# Altium PCB ADCS.PcbDoc
Units mm, origin at the board's own origin, x right, y up, seen from the top; angles counter-clockwise.
Board outline 37.67 x 75.03 mm, 4 copper layers (Top Layer, Ground Plane, Power Plane, Bottom Layer), stack 0.844 mm thick; 27 components, 59 nets, 210 pads, 48 vias.
Unrouted connection lines stored in the file: 13.
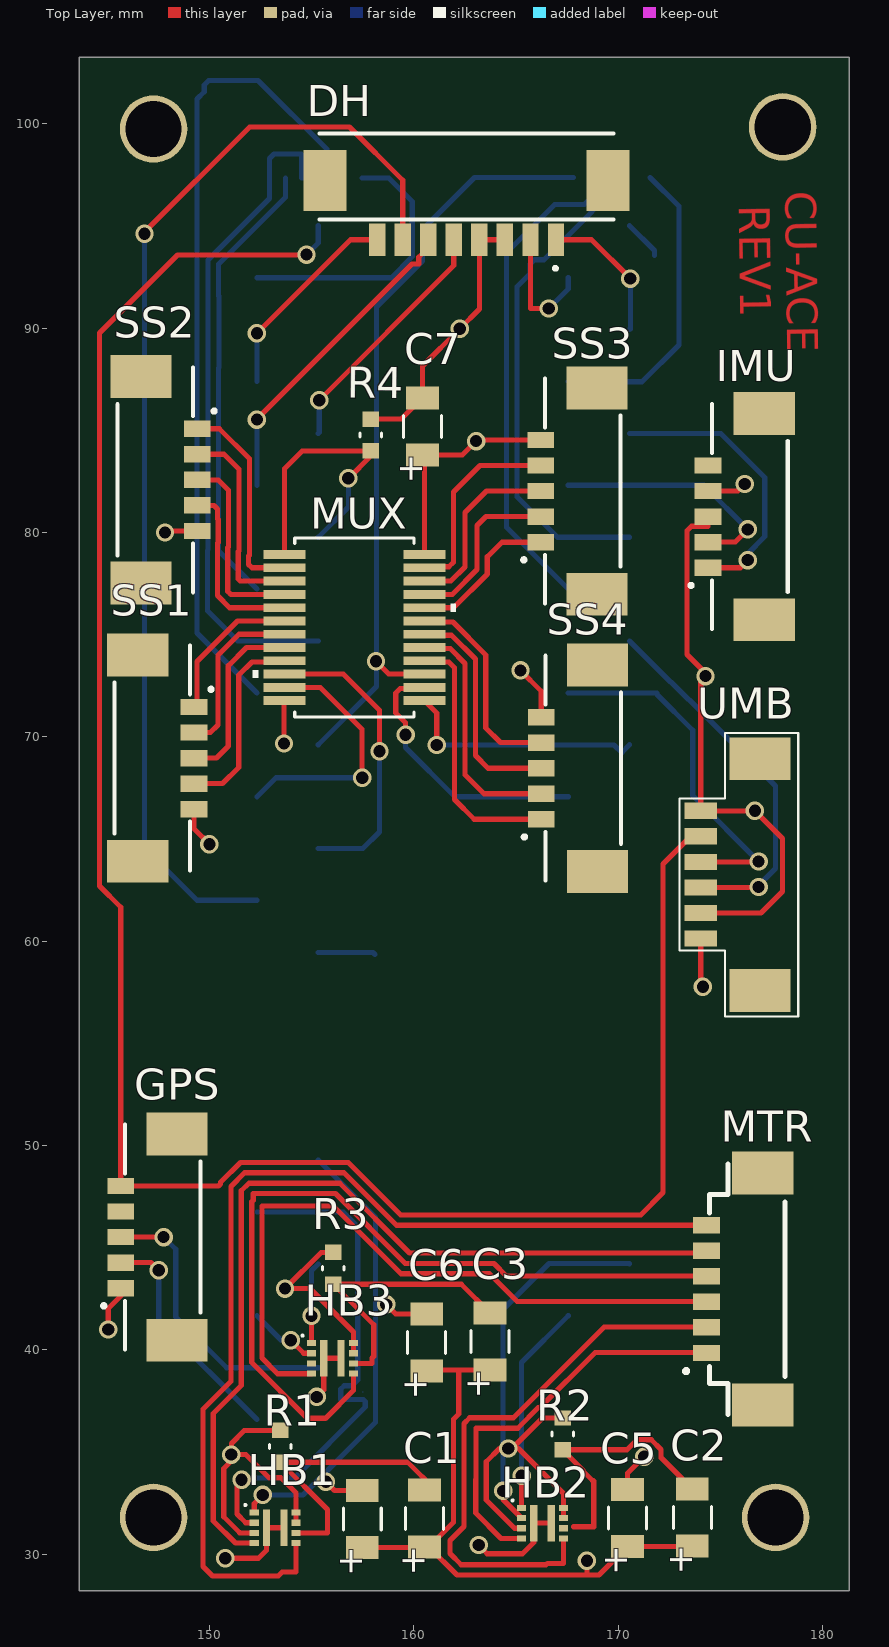
[diagram p0: Top Layer view]
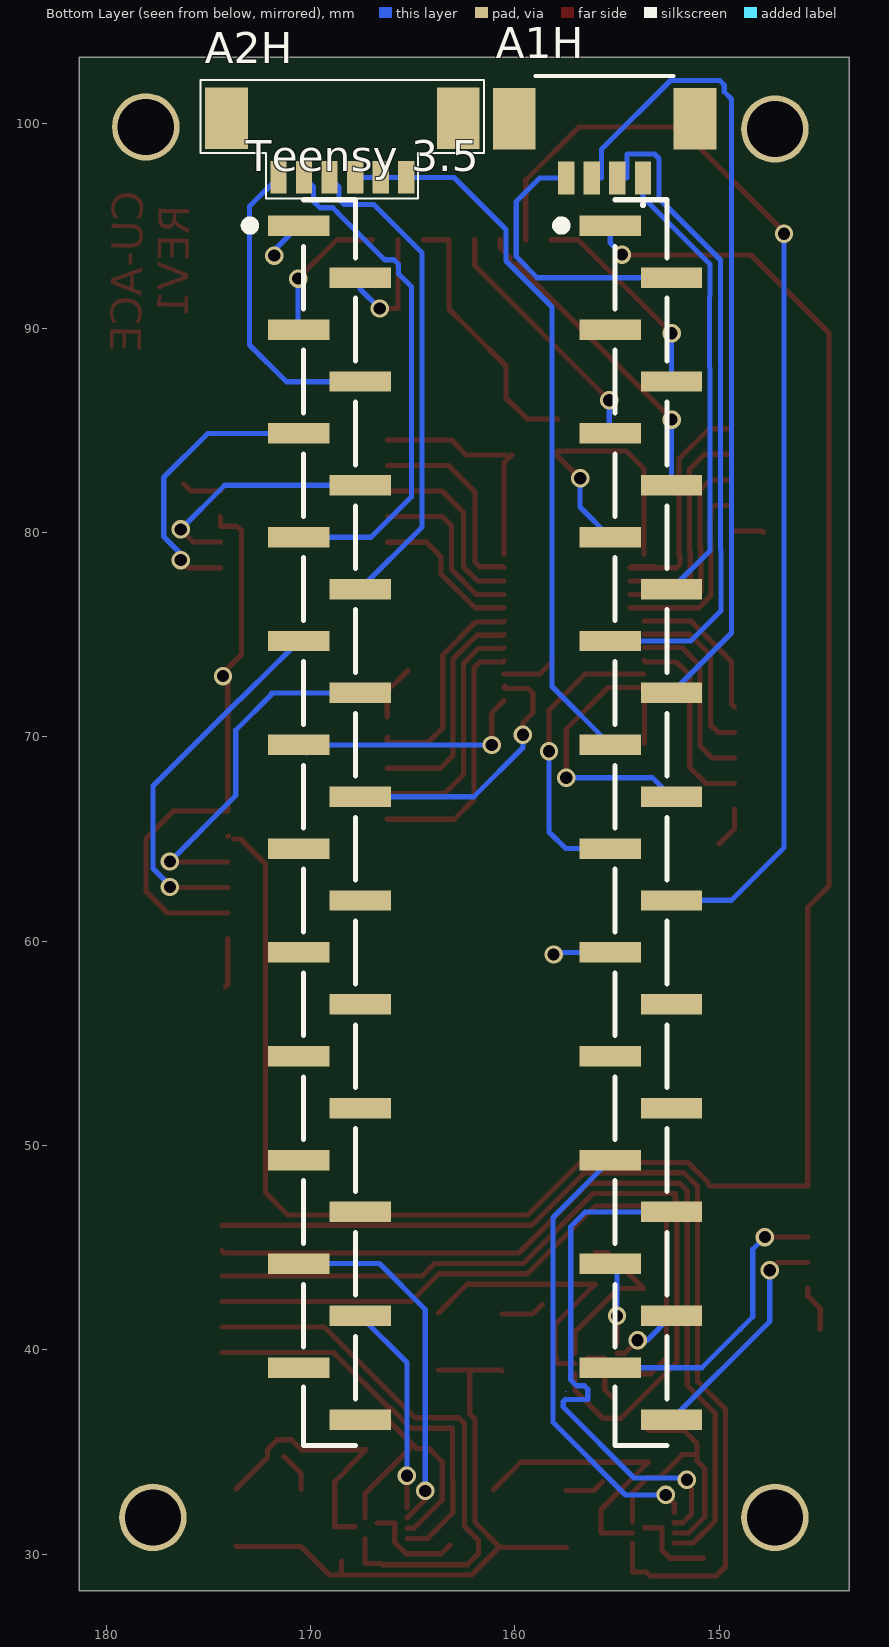
[diagram p1: Bottom Layer view, seen from below]
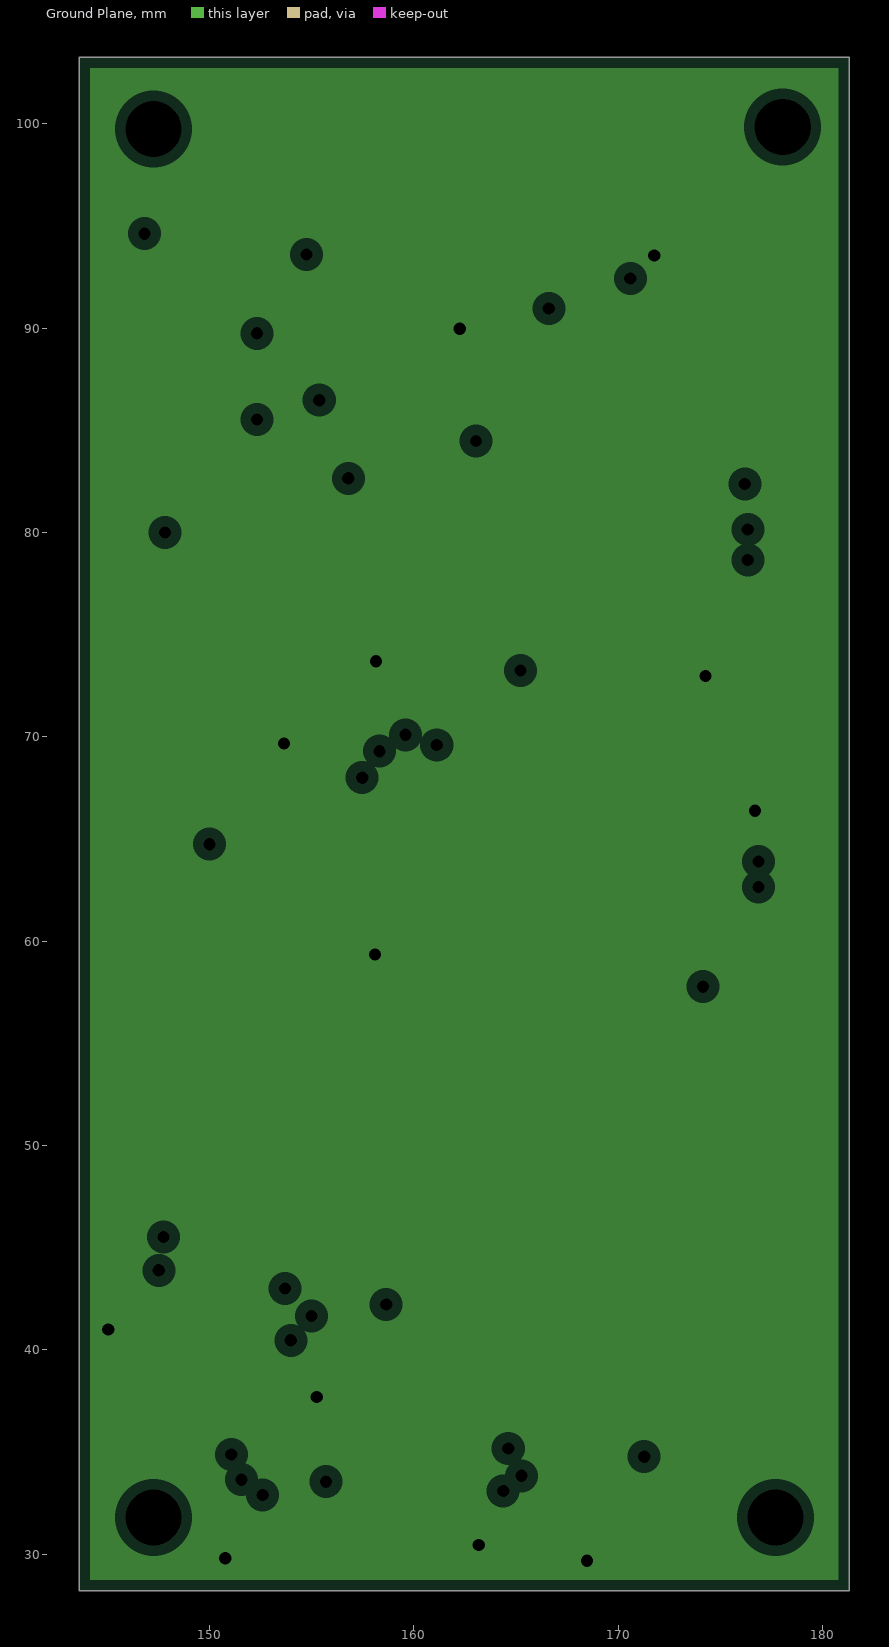
[diagram p2: Ground Plane, clearances drawn from the general rule]
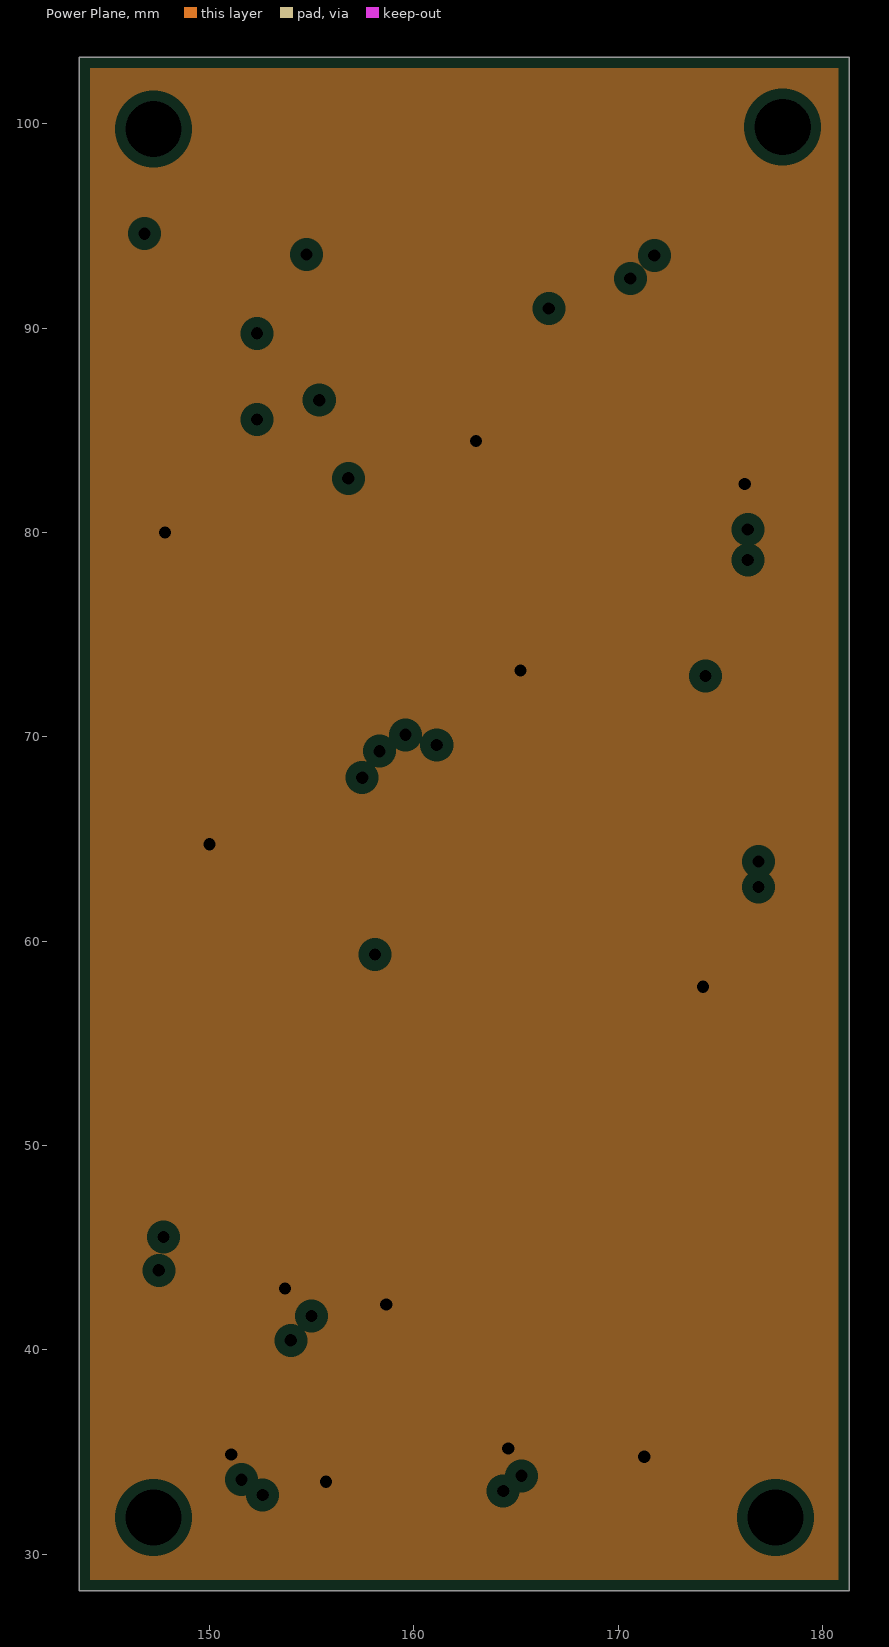
[diagram p3: Power Plane, clearances drawn from the general rule]

## Layer stack, top to bottom
Top Solder: solder mask 0.0102, Solder Resist, Dk 3.5
Top Layer: signal copper 0.0356
Dielectric 1: core 0.32, FR-4, Dk 4.8
Ground Plane: plane copper 0.036, net GND
Dielectric 3: prepreg 0.127, Dk 4.2
Power Plane: plane copper 0.036, net 3.3V
Dielectric 4: core 0.254, Dk 4.2
Bottom Layer: signal copper 0.0356
Bottom Solder: solder mask 0.0102, Solder Resist, Dk 3.5

## Board outline
143.637,103.251 181.305,103.251 181.305,28.219 143.637,28.219

## Design rules (kind name [scope] priority, off if disabled: settings)
Clearance Clearance_1 [All] p1: gap=0.254 ignorepadtopadclearanceinfootprint=FALSE except(0: Arc-Hole Track-Hole SMDPad-Hole THPad-Hole Via-Hole Fill-Hole Poly-Hole Region-Hole Text-Hole)
PlaneClearance [All] p1: clearance=0.508
PlaneConnect [InNet('3.3V')] p1: planeconnectstyle=Relief reliefexpansion=0.508 reliefentries=4 reliefconductorwidth=0.254 reliefairgap=0.254
PolygonConnect [All] p1: connectstyle=Relief reliefconductorwidth=0.254 reliefentries=4 polygonreliefangle="90 Angle" airgapwidth=0.254
RoomDefinition Top [InComponentClass('Top')] p1: confinementstyle=ConfineIn formatcopy=TRUE lockcomponents=FALSE outline 0,0 50.8,0 50.8,25.4 0,25.4
RoutingVias [All] p1: holewidth=0.6 width=0.9 viastyle="Through Hole" minholewidth=0.6 minwidth=0.9 maxholewidth=0.6 maxwidth=0.9
SMDNeckDown [All] p1: percent=50.000
SolderMaskExpansion [All] p1: expansion=0.102
Width [All] p1: maxlimit=0.254 minlimit=0.254 preferedwidth=0.254
28 further rules are at their usual default settings.

## Components (designator, comment, footprint, x,y, rotation, side; value= is the part's Value field where it differs from the comment)
A1H "53261-0471" 53261-0471 155.6,98.146 r0 bottom
A2H "53261-0671" 53261-0671 171.563,97.379 r0 bottom
C1 "C1206" CC1206N 160.528,31.75 r90 top value="10uF (10V)"
C2 "C1206" CC1206N 173.634,31.801 r90 top value="10uF (10V)"
C3 "C1206" CC1206N 163.728,40.411 r90 top value="10uF (10V)"
C4 "C0402" CC1206N 157.48,31.725 r90 top value="1uF (10V)"
C5 "C0402" CC1206N 170.459,31.775 r90 top value="1uF (10V)"
C6 "C0402" CC1206N 160.63,40.361 r90 top value="1uF (10V)"
C7 "C0402" CC1206N 160.426,85.192 r90 top value="0.1uF (10V)"
DH "53261-0871" 53261-0871 162.585,95.326 r180 top
GPS "53398-0571" 53398-0571 145.862,45.521 r90 top
HB1 "H-Bridge" AP1017 154.245,30.543 r0 top
HB2 "H-Bridge" AP1017 167.326,30.771 r0 top
HB3 "H-Bridge" AP1017 157.048,38.837 r0 top
IMU "53398-0571" 53398-0571 174.601,80.779 r90 top
MTR "53398-0671" 533980671 174.475,42.975 r90 top
MUX "CD74HC4067SM96" CD74HC4067SM96 152.857,79.658 r0 top
R1 "ERJ-3EKF6042V" RC0603N 153.467,35.281 r270 top value=Value
R2 "ERJ-3EKF6042V" RC0603N 167.284,35.89 r270 top value=Value
R3 "ERJ-3EKF6042V" RC0603N 156.058,43.993 r270 top value=Value
R4 "" RC0603N 157.9,84.772 r270 top value=Value
SS1 "53398-0571" 53398-0571 149.047,68.961 r270 top
SS2 "53398-0571" 53398-0571 149.2,82.575 r270 top
SS3 "53398-0571" 53398-0571 166.418,82.027 r90 top
SS4 "53398-0571" 53398-0571 166.443,68.468 r90 top
"Teensy 3.5" "61002418221" 61002418221 169.065,89.93 r270 bottom
UMB "53261-0671" 53261-0671 174.041,66.379 r90 top

## Footprints (in the part's own frame and the unit in brackets; to place one, negate y for a bottom-side part, rotate by r counter-clockwise, add the part's x,y. Pads: shape width x height; smd on the part's side, far side on the other; paste and mask are expansions set on the pad)
53261-0471 [mm]
  rect 0.8x1.6 smd: 1(-1.875,0.8) 2(-0.625,0.8) 3(0.625,0.8) 4(1.875,0.8)
  rect 2.1x3 smd: 5(4.425,-2.1) 6(-4.425,-2.1)
  silkscreen extent -3.37,-4.2 3.37,2.17
53261-0671 [mm]
  rect 0.8x1.6 smd: 1(0,0) 2(-1.25,0) 3(-2.5,0) 4(-3.75,0) 5(-5,0) 6(-6.25,0)
  rect 2.1x3 smd: 7(-8.8,-2.9) 8(2.55,-2.9)
  silkscreen extent -10.06,-4.78 3.81,1.03
53261-0871 [mm]
  rect 0.8x1.6 smd: 1(-4.375,1.004) 2(-3.125,1.004) 3(-1.875,1.004) 4(-0.625,1.004) 5(0.625,1.004) 6(1.875,1.004) 7(3.125,1.004) 8(4.375,1.004)
  rect 2.1x3 smd: 9(6.925,-1.896) 10(-6.925,-1.896)
  silkscreen extent -7.19,-4.2 7.19,2.46
53398-0571 [mm]
  rect 0.8x1.3 smd: 1(-2.5,0.2) 2(-1.25,0.2) 3(0,0.2) 4(1.25,0.2) 5(2.5,0.2)
  rect 2.1x3 smd: 6(-5.05,-2.55) 7(5.05,-2.55)
  silkscreen extent -5.5,-3.7 5.5,1.11
533980671 [mm]
  rect 0.8x1.3 smd: 1(-3.125,0.15) 2(-1.875,0.15) 3(-0.625,0.15) 4(0.625,0.15) 5(1.875,0.15) 6(3.125,0.15)
  rect 2.1x3 smd: 7(-5.675,-2.6) 8(5.675,-2.6)
  silkscreen extent -6.12,-3.7 6.12,1.22
61002418221 [mm]
  rect 1x3 smd: 1(-5.08,-1.5) 2(-2.54,1.5) 3(0,-1.5) 4(2.54,1.5) 5(5.08,-1.5) 6(7.62,1.5) 7(10.16,-1.5) 8(12.7,1.5) 9(15.24,-1.5) 10(17.78,1.5) 11(20.32,-1.5) 12(22.86,1.5) 13(25.4,-1.5) 14(27.94,1.5) 15(30.48,-1.5) 16(33.02,1.5) 17(35.56,-1.5) 18(38.1,1.5) 19(40.64,-1.5) 20(43.18,1.5) 21(45.72,-1.5) 22(48.26,1.5) 23(50.8,-1.5) 24(53.34,1.5) 25(53.34,16.74) 26(50.8,13.74) 27(48.26,16.74) 28(45.72,13.74) 29(43.18,16.74) 30(40.64,13.74) 31(38.1,16.74) 32(35.56,13.74) 33(33.02,16.74) 34(30.48,13.74) 35(27.94,16.74) 36(25.4,13.74) 37(22.86,16.74) 38(20.32,13.74) 39(17.78,16.74) 40(15.24,13.74) 41(12.7,16.74) 42(10.16,13.74) 43(7.62,16.74) 44(5.08,13.74) 45(2.54,16.74) 46(0,13.74) 47(-2.54,16.74) 48(-5.08,13.74)
  silkscreen extent -6.35,-4.09 54.61,16.51
AP1017 [mm] "SON, 8-Leads, Body 2.00x2.00mm, Pitch 0.50mm, Thermal Pad 1.80x1.07mm, IPC Medium Density"
  rect 0.45x0.3 smd: 1(-2.05,1.5) 2(-2.05,1) 3(-2.05,0.5) 4(-2.05,0) 5(0,0) 6(0,0.5) 7(0,1) 8(0,1.5)
  rect 0.35x1.8 smd: 9(-1.45,0.75) 9(-0.6,0.75)
  silkscreen extent -2.54,1.81 -2.44,1.91, body extent -2.05,-0.27 0,1.78, height 0.6
CC1206N [mil]
  rect 44x63 smd paste+0 mask+0: 1(-55,0) 2(55,0)
  silkscreen extent -21,-36 21,36, body extent 0,0 10,10, height 10
CD74HC4067SM96 [mil] "16:1 Mux"
  rect 81x17 smd: 1(32,-29) 2(32,-54.59) 3(32,-80.18) 4(32,-105.77) 5(32,-131.36) 6(32,-156.95) 7(32,-182.54) 8(32,-208.13) 9(32,-233.72) 10(32,-259.31) 11(32,-284.91) 12(32,-310.5) 13(302,-310.5) 14(302,-284.91) 15(302,-259.31) 16(302,-233.72) 17(302,-208.13) 18(302,-182.54) 19(302,-156.95) 20(302,-131.36) 21(302,-105.77) 22(302,-80.18) 23(302,-54.59) 24(302,-29)
  silkscreen extent -28,-342 362,3, body extent 167,-170 177,-160, height 10
RC0603N [mm]
  rect 0.756x0.8 smd paste+0 mask+0: 1(-0.778,0) 2(0.778,0)
  silkscreen extent -0.09,-0.53 0.09,0.53, body extent 0,0 0.25,0.25, height 0.25

## Part data
A1H: "4 way SMT r/a header Molex PICOBLADE Series, Series Number 53261, 1.25mm Pitch 4 Way 1 Row Shrouded Right Angle PCB Header, Surface Mount", Manufacturer_Name=Molex, RS Part Number=5427113P, Datasheet Link=http://www.molex.com/webdocs/datasheets/pdf/en-us//0532610471_PCB_HEADERS.pdf, Geometry.Height=mm, Manufacturer_Part_Number=53261-0471, Supplier_Name=RS
A2H UMB: "Molex PICOBLADE Series, Series Number 53261, 1.25mm Pitch 6 Way 1 Row Right Angle PCB Header, Solder Termination, 1A", Manufacturer_Name=Molex, RS Part Number=5427135P, Datasheet Link=http://docs-europe.electrocomponents.com/webdocs/078f/0900766b8078fc7f.pdf, Geometry.Height=mm, Manufacturer_Part_Number=53261-0671, Supplier_Name=RS
C1 C2 C3 C4 C5 C6 C7: "Ceramic Chip Capacitor - Standard", PackageDocument=Mar-2001, ComponentLink1Description="Manufacturer Link", ComponentLink1URL=http://www.kemet.com/, ComponentLink2Description=Datasheet, ComponentLink2URL=http://www.kemet.com/kemet/web/homepage/kechome.nsf/vapubfilesname/F3102TA.pdf/$file/F3102TA.pdf, DatasheetDocument=Mar-2001, LatestRevisionDate=19-Mar-2004, LatestRevisionNote="Silkscreen size reduced.", Published=17-Jul-2002, Publisher="Altium Limited"
  C1 C2 C3: Code_IPC="3216 [1206]", Code_JEITA=1206, PackageReference=1206
  C4 C5 C6 C7: Code_IPC="1005 [0402]", Code_JEITA=0402, Note="Footprint corresponds to dimensions for bulk cassette packaging. This case size has tightened tolerances.", PackageReference=0402
DH: "Molex PICOBLADE Series, Series Number 53261, 1.25mm Pitch, 8 Way 1 Row Shrouded Right Angle PCB Header, Surface Mount", Manufacturer_Name=Molex, RS Part Number=5427157P, Datasheet Link=http://www.molex.com/webdocs/datasheets/pdf/en-us/0532610871_PCB_HEADERS.pdf, Geometry.Height=mm, Manufacturer_Part_Number=53261-0871, Supplier_Name=RS
GPS IMU SS1 SS2 SS3 SS4: "Molex PICOBLADE Series, Series Number 53398, 1.25mm Pitch 5 Way 1 Row Straight PCB Header, Solder Termination, 1A", Manufacturer_Name=Molex, RS Part Number=5427292, Datasheet Link=http://www.molex.com/pdm_docs/sd/533980571_sd.pdf, Geometry.Height=mm, Manufacturer_Part_Number=53398-0571, Supplier_Name=RS
HB1 HB2 HB3: library part AP1017AEN
MTR: "Molex PICOBLADE Series, Series Number 53398, 1.25mm Pitch 6 Way 1 Row Straight PCB Header, Solder Termination, 1A", Manufacturer_Name=Molex, RS Part Number=5427214P, Allied_Number=70090674, Datasheet Link=http://docs-europe.electrocomponents.com/webdocs/13c4/0900766b813c4502.pdf, Geometry.Height=mm, Manufacturer_Part_Number=53398-0671, Supplier_Name=RS
R1 R2 R3: "Imported", Built_By=EMA_UL_Team, C="Copyright (C) 2015 Accelerated Designs. All rights reserved", Manufacturer_Part_Number=ERJ-3EKF6042V, Vendor=Panasonic
R4: library part ERJ-3EKF6042V, "Imported", Built_By=EMA_UL_Team, C="Copyright (C) 2015 Accelerated Designs. All rights reserved", Manufacturer_Part_Number=ERJ-3EKF6042V, Vendor=Panasonic
"Teensy 3.5": "Wurth Elektronik WR-PHD Series, Series Number 6100, 2.54mm Pitch 24 Way 1 Row Right Angle PCB Header", Manufacturer_Name="Würth Elektronik", RS Part Number=1216841, Datasheet Link=http://katalog.we-online.de/em/datasheet/6100xx18221.pdf, Geometry.Height=mm, Manufacturer_Part_Number=61002418221, Supplier_Name=RS

## Free pads (board coordinates)
  round 3.302 hole 2.75: 6(147.269,31.801) 6(147.269,99.746) 6(177.709,31.801) 6(178.054,99.847)

## Via types
v1: diameter 0.9, hole 0.6, Top Layer to Bottom Layer, 25 vias
v2: diameter 0.9, hole 0.6, Top Layer to Power Plane, 12 vias
v3: diameter 0.9, hole 0.6, Top Layer to Ground Plane, 9 vias
v4: diameter 0.9, hole 0.6, Ground Plane to Bottom Layer, 2 vias

## Nets (pads, with @x,y where several pads share a name; then routed paths per layer and width w, separated by ;. In a path a pad name is that pad's centre, name@x,y a point inside that pad or via, vN(x,y) a via of type N, cw(c..) or ccw(c..) an arc to the next point about the centre after c; other vN are vias at no path point)
3.3V: C4.2 C5.2 C6.2 C7.1 HB1.3 HB1.7 HB1.8 HB2.3 HB2.7 HB2.8 HB3.3 HB3.7 HB3.8 IMU.4 MUX.24 R1.1 R2.1 R3.1 SS1.5 SS2.5 SS3.5 SS4.5 UMB.6 | length 62.9
  Top Layer w0.254: v2(147.825,80) 147.9,80.075 SS2.5 ; SS1.5 149.247,65.503 v2(150,64.75) ; 151.49,31.043 HB1.3 ; 151.49,31.051 151.482,31.051 150.698,31.834 150.698,34.198 151.075,34.575 v2(151.075,34.875) ; R1.1 151.708,36.058 151.075,35.425 v2(151.075,34.875) ; HB1.7@154.245,31.574 HB1.8 154.245,33.007 153.507,33.744 152.909,33.744 151.778,34.875 v2(151.075,34.875) ; v2(155.7,33.55) 156.128,33.122 C4.2 ; R3.1 155.471,44.771 v2(153.7,43) 154.925,43 157.048,40.877 HB3.8 HB3.7 ; v2(158.65,42.225) 159.117,41.758 C6.2 ; C7.1@160.147,83.795 160.528,83.414 MUX.24 ; C7.1 162.37,83.795 v2(163.05,84.475) 163.102,84.527 SS3.5 ; 165.125,35.175 167.326,32.974 HB2.8 HB2.7 ; v2(165.225,73.25) 166.243,72.232 SS4.5 ; HB2.3 164.929,31.271 163.544,32.656 163.544,33.444 163.551,33.451 163.551,34.525 164.201,35.175 v2(164.625,35.175) 164.81,35.175 166.303,36.668 R2.1 ; C5.2 170.459,33.959 v2(171.275,34.775) ; UMB.6 174.041,57.884 v2(174.15,57.775) ; IMU.4 175.854,82.029 v2(176.2,82.375)
5V: "Teensy 3.5.48" GPS.5 UMB.2 | length 102.3
  Top Layer w0.254: v1(154.75,93.6) 154.725,93.575 148.432,93.575 144.616,89.759 144.616,62.703 145.662,61.657 GPS.5 150.446,48.021 150.546,48.121 150.546,48.205 151.515,49.174 156.798,49.174 159.364,46.608 171.108,46.608 172.2,47.7 172.2,63.776 173.424,65 UMB.2@173.75,65 ; UMB.2@174.02,65.15 UMB.2
  Bottom Layer w0.254: v1(154.75,93.6) 155.325,94.175 155.325,95.01
A2: "Teensy 3.5.38" A2H.4 A2H.5 A2H.6 | length 35.8
  Bottom Layer w0.254: 155.325,69.61 158.175,72.46 158.175,91.032 160.433,93.29 160.433,94.833 162.979,97.379 A2H.6 A2H.5 A2H.4
A3: "Teensy 3.5.39" A1H.3 | length 40.5
  Bottom Layer w0.254: 152.325,72.15 149.392,75.083 149.392,101.217 149.744,101.569 149.744,101.903 149.968,102.127 152.383,102.127 155.756,98.753 155.756,97.346 A1H.3
A4: "Teensy 3.5.40" A1H.2 | length 32.7
  Bottom Layer w0.254: A1H.2 154.506,97.346 154.506,98.527 153.168,98.527 152.944,98.303 152.944,96.347 149.936,93.338 149.936,79.161 149.9,79.125 149.9,76.175 151.385,74.69 155.325,74.69
A5: "Teensy 3.5.41" A1H.1 | length 22.3
  Bottom Layer w0.254: 152.325,77.23 150.444,79.111 150.444,88.048 150.475,88.079 150.475,91.558 150.444,91.589 150.444,93.128 153.725,96.409 A1H.1
A6: "Teensy 3.5.42" MUX.1 R4.2 | length 14.1
  Top Layer w0.254: MUX.1 153.67,83.12 154.544,83.994 R4.2 157.9,83.75 v1(156.8,82.65)
  Bottom Layer w0.254: 155.325,79.77 156.8,81.245 v1(156.8,82.65)
A_GND: "Teensy 3.5.47" A1H.4 | length 13.7
  Bottom Layer w0.254: 152.325,92.47 158.895,92.47 159.925,93.5 159.925,96.2 158.779,97.346 A1H.4
GND: "Teensy 3.5.1" "Teensy 3.5.34" C1.1 C2.1 C3.1 C4.1 C5.1 C6.1 C7.2 DH.3 DH.4 GPS.1 HB1.9 HB2.9 HB3.9 IMU.3 MUX.12 MUX.15 R4.1 UMB.1 UMB.5 | length 94.6
  Top Layer w0.254: v3(145.05,41) 145.05,42.025 145.662,42.637 GPS.1 ; v3(150.775,29.8) 152.4,29.8 152.795,30.195 152.795,31.293 HB1.9@153.645,31.293 ; v3(153.65,69.675) 153.65,71.751 MUX.12 ; v3(155.25,37.7) 155.598,38.048 155.598,39.587 HB3.9@156.448,39.587 ; C4.1 C1.1@160.528,30.328 ; R4.1 159.388,85.55 C7.2 160.426,88.151 v3(162.25,89.975) 163.21,90.935 DH.4 DH.3 ; v3(158.15,73.7) 158.779,73.071 MUX.15 ; C1.1 C1.1@160.738,30.353 ; C6.1 160.68,39.014 162.2,39.014 ; v3(163.175,30.45) 163.6,30.025 165.325,30.025 165.876,30.576 165.876,31.521 HB2.9@166.726,31.521 ; C3.1 162.2,39.014 ; v3(168.475,29.675) 168.475,28.981 ; C2.1 173.609,30.378 C5.1 169.062,28.981 168.475,28.981 ; UMB.5 176.996,61.379 178.05,62.432 178.05,65.025 v3(176.696,66.379) UMB.1 174.041,72.741 v1(174.275,72.975) 174.275,73.125 173.37,74.03 173.37,80.087 173.593,80.31 174.401,80.31 IMU.3 ; C1.1@160.738,30.353 162.11,28.981 168.475,28.981 ; C1.1@160.738,30.353 161.95,31.565 161.95,36.609 162.2,36.858 162.2,39.014
  Bottom Layer w0.254: 155.325,59.45 158,59.45 v4(158.1,59.35) ; 170.565,95.01 171.775,93.8 v4(171.775,93.55)
GPIO_0: "Teensy 3.5.2" DH.2 | length 6.2
  Top Layer w0.254: DH.2 165.71,90.965 v1(166.61,90.965)
  Bottom Layer w0.254: v1(166.61,90.965) 167.565,91.919 167.565,92.47
GPIO_1: "Teensy 3.5.3" DH.1 | length 6.9
  Top Layer w0.254: DH.1 168.703,94.322 v1(170.6,92.425)
  Bottom Layer w0.254: 170.565,89.93 170.6,89.965 v1(170.6,92.425)
GPIO_9: "Teensy 3.5.11" MUX.13 | length 12.2
  Top Layer w0.254: MUX.13 161.125,71.174 v1(161.125,69.6)
  Bottom Layer w0.254: v1(161.125,69.6) 169.805,69.6 170.18,69.225 170.565,69.61
GPIO_10: "Teensy 3.5.12" MUX.14 | length 13.4
  Top Layer w0.254: v1(159.6,70.1) 159.6,70.693 159.118,71.174 159.118,72.145 159.341,72.368 160.475,72.368 MUX.14 MUX.14@160.475,72.474
  Bottom Layer w0.254: v1(159.6,70.1) 159.6,69.475 162.005,67.07 167.565,67.07
GPIO_13: "Teensy 3.5.35" DH.7 | length 55.6
  Top Layer w0.254: v1(146.825,94.625) 146.75,94.625 151.975,99.85 156.85,99.85 159.46,97.24 DH.7
  Bottom Layer w0.254: v1(146.825,94.625) 146.825,64.575 149.4,62 152.315,62 152.325,61.99
GPIO_14: "Teensy 3.5.36" MUX.10 | length 14.7
  Top Layer w0.254: MUX.10 156.554,73.071 158.325,71.3 v1(158.325,69.3)
  Bottom Layer w0.254: 155.325,64.53 157.505,64.53 158.325,65.35 v1(158.325,69.3)
GPIO_15: "Teensy 3.5.37" MUX.11 | length 12.6
  Top Layer w0.254: MUX.11 155.429,72.421 157.475,70.375 v1(157.475,68)
  Bottom Layer w0.254: 152.325,67.07 153.255,68 v1(157.475,68)
MTR1A: HB1.4 MTR.5 | length 43.6
  Top Layer w0.254: HB1.4 151.27,30.543 150.19,31.623 150.19,36.881 151.562,38.252 151.562,47.785 151.936,48.158 156.377,48.158 159.796,44.739 174.214,44.739 MTR.5
MTR1B: HB1.5 MTR.6 | length 50
  Top Layer w0.254: HB1.5 154.245,29.124 153.566,29.124 153.372,28.931 150.144,28.931 149.682,29.393 149.682,37.091 151.054,38.463 151.054,47.995 151.725,48.666 156.587,48.666 159.154,46.1 MTR.6
MTR2A: HB2.4 MTR.1 | length 19.7
  Top Layer w0.254: HB2.4 164.275,30.771 163.036,32.011 163.036,33.655 163.043,33.661 163.043,36.17 165.087,36.17 166.093,37.176 166.183,37.176 168.879,39.873 MTR.1@174.325,39.873
MTR2B: HB2.5 MTR.2 | length 27.5
  Top Layer w0.254: HB2.5 167.326,29.55 166.539,29.55 166.479,29.489 162.32,29.489 161.775,30.035 161.775,30.671 162.458,31.355 162.458,36.398 162.738,36.678 164.876,36.678 169.321,41.123 MTR.2@174.325,41.123
MTR3A: HB3.4 MTR.3 | length 33.9
  Top Layer w0.254: HB3.4 153.34,38.837 152.578,39.599 152.578,47.041 156.058,47.041 159.375,43.723 163.712,43.723 165.062,42.373 MTR.3@174.325,42.373
MTR3B: HB3.5 MTR.4 | length 39.6
  Top Layer w0.254: HB3.5 157.048,38.024 155.674,36.65 154.808,36.65 152.07,39.388 152.07,47.251 152.146,47.327 152.146,47.65 156.166,47.65 159.586,44.231 163.922,44.231 164.53,43.623 MTR.4@174.325,43.623
NetC1_2: C1.2 HB1.6 R1.2 | length 14.1
  Top Layer w0.254: HB1.6 155.774,31.043 155.774,32.195 R1.2 159.706,34.503 C1.2@161.036,33.172
NetC2_2: C2.2 HB2.6 R2.2 | length 13.2
  Top Layer w0.254: 167.812,31.344 168.808,31.344 168.808,33.588 168.803,33.594 168.756,33.594 168.269,34.081 168.269,34.128 R2.2 170.437,35.112 170.931,35.606 171.619,35.606 172.106,35.119 172.106,34.726 C2.2
NetC3_2: C3.2 HB3.6 R3.2 | length 13.9
  Top Layer w0.254: HB3.6 157.955,39.337 157.955,39.606 158.04,39.692 158.04,41.232 R3.2 162.322,43.215 C3.2
PT1: MUX.9 SS1.4 | length 9.6
  Top Layer w0.254: SS1.4 150.642,67.711 151.435,68.504 151.435,73.025 152.078,73.668 153.617,73.668 MUX.9
PT2: MUX.8 SS1.3 | length 9
  Top Layer w0.254: SS1.3 150.343,68.961 150.927,69.545 150.927,73.482 151.816,74.371 MUX.8
PT3: MUX.7 SS1.2 | length 8.4
  Top Layer w0.254: SS1.2 150.043,70.211 150.419,70.587 150.419,73.99 151.45,75.021 MUX.7
PT4: MUX.6 SS1.1 | length 7.4
  Top Layer w0.254: SS1.1 149.398,71.612 149.398,73.688 151.381,75.671 MUX.6
PT5: MUX.5 SS2.4 | length 9.5
  Top Layer w0.254: SS2.4 150.221,81.325 150.393,81.153 150.393,80.67 150.431,80.633 150.431,79.518 150.393,79.48 150.393,76.916 150.988,76.321 MUX.5 MUX.5@154.356,76.321
PT6: MUX.4 SS2.3 | length 10.2
  Top Layer w0.254: SS2.3 150.431,82.575 150.939,82.067 150.939,79.307 150.901,79.27 150.901,77.126 151.056,76.971 MUX.4 MUX.4@154.356,76.971
PT7: MUX.3 SS2.2 | length 10.7
  Top Layer w0.254: SS2.2 150.718,83.825 151.447,83.097 151.447,79.097 151.409,79.06 151.409,77.721 151.51,77.621 MUX.3 MUX.3@154.356,77.621
PT8: MUX.2 SS2.1 | length 12.1
  Top Layer w0.254: SS2.1 150.484,85.075 151.955,83.605 151.955,78.886 151.917,78.849 151.917,78.44 152.086,78.271 MUX.2 154.356,78.271 154.303,78.324 MUX.2@153.169,78.324
PT9: MUX.23 SS3.4 | length 9.8
  Top Layer w0.254: MUX.23 160.581,78.324 161.715,78.324 161.938,78.547 161.938,81.978 163.237,83.277 SS3.4
PT10: MUX.22 SS3.3 | length 9.1
  Top Layer w0.254: MUX.22 161.811,77.621 162.509,78.319 162.509,80.975 163.561,82.027 SS3.3
PT11: MUX.21 SS3.2 | length 8.5
  Top Layer w0.254: MUX.21 161.88,76.971 163.093,78.185 163.093,80.34 163.531,80.777 SS3.2
PT12: MUX.20 SS3.1 | length 7.5
  Top Layer w0.254: MUX.20 161.948,76.321 163.601,77.974 163.601,78.816 164.313,79.527 SS3.1
PT13: MUX.19 SS4.4 | length 10.5
  Top Layer w0.254: MUX.19 160.528,75.618 161.92,75.618 163.525,74.013 163.525,70.434 164.242,69.718 SS4.4 SS4.4@166.243,69.956
PT14: MUX.18 SS4.3 | length 11.2
  Top Layer w0.254: MUX.18 160.581,74.968 161.851,74.968 163.017,73.802 163.017,69.088 163.638,68.468 SS4.3
PT15: MUX.17 SS4.2 | length 11.9
  Top Layer w0.254: MUX.17 160.581,74.318 161.783,74.318 162.509,73.592 162.509,68.148 163.44,67.218 SS4.2
PT16: MUX.16 SS4.1 | length 12.7
  Top Layer w0.254: MUX.16 160.581,73.668 161.715,73.668 162.001,73.381 162.001,66.929 162.963,65.968 SS4.1
PWM_2: "Teensy 3.5.4" A2H.1 | length 15
  Bottom Layer w0.254: 167.565,87.39 167.58,87.375 171.175,87.375 172.975,89.175 172.975,95.967 A2H.1
PWM_5: "Teensy 3.5.7" A2H.2 | length 24.8
  Bottom Layer w0.254: A2H.2 169.844,96.91 169.844,96.198 169.537,95.891 168.907,95.891 168.684,95.668 168.684,95.659 166.376,93.351 165.907,93.351 165.684,93.128 165.684,92.659 165.05,92.025 165.05,81.75 167.03,79.77 170.565,79.77
PWM_6: "Teensy 3.5.8" A2H.3 | length 24.1
  Bottom Layer w0.254: 167.565,77.23 164.542,80.253 164.542,93.692 166.9,96.05 168.348,96.05 168.594,96.296 168.594,96.91 A2H.3
PWM_21: "Teensy 3.5.43" DH.6 | length 15.7
  Top Layer w0.254: v1(152.325,85.525) 152.325,85.55 159.916,93.141 160.241,93.141 160.241,93.466 160.71,93.935 DH.6
  Bottom Layer w0.254: 152.325,82.31 v1(152.325,85.525)
PWM_22: "Teensy 3.5.44" DH.5 | length 12.2
  Top Layer w0.254: v1(155.375,86.475) 161.96,93.06 DH.5
  Bottom Layer w0.254: 155.325,84.85 155.375,84.9 v1(155.375,86.475)
PWM_23: "Teensy 3.5.45" DH.8 | length 10.1
  Top Layer w0.254: v1(152.325,89.75) 156.897,94.322 DH.8
  Bottom Layer w0.254: 152.325,87.39 v1(152.325,89.75)
PWM_29: "Teensy 3.5.21" HB2.2 | length 17.7
  Top Layer w0.254: v1(164.375,33.1) 164.375,32.672 HB2.2
  Bottom Layer w0.254: v1(164.375,33.1) 164.375,41.975 166.625,44.225 170.55,44.225 170.565,44.21
PWM_30: "Teensy 3.5.22" HB2.1 | length 10.3
  Top Layer w0.254: HB2.1 v1(165.276,33.835)
  Bottom Layer w0.254: v1(165.276,33.835) 165.276,39.381 167.565,41.67
PWM_35: "Teensy 3.5.27" HB3.2 | length 3.7
  Top Layer w0.254: v1@153.987,40.163 v1(153.987,40.466) 154.616,39.837 HB3.2
  Bottom Layer w0.254: 152.325,41.67 153.529,40.466 v1(153.987,40.466)
PWM_36: "Teensy 3.5.28" HB3.1 | length 4
  Top Layer w0.254: HB3.1 v1(154.998,41.663)
  Bottom Layer w0.254: v1(154.998,41.663) 154.998,43.883 155.325,44.21
PWM_37: "Teensy 3.5.29" HB1.2 | length 26.1
  Top Layer w0.254: v1(151.575,33.65) 151.35,33.425 151.35,31.975 151.782,31.543 HB1.2
  Bottom Layer w0.254: v1(151.575,33.65) 151.658,33.733 154.158,33.733 157.625,37.2 157.625,37.469 157.525,37.569 156.431,37.569 156.431,38.08 156.6,38.249 156.983,38.249 157.259,38.525 157.259,46.041 156.55,46.75 152.325,46.75
PWM_38: "Teensy 3.5.30" HB1.1 | length 22.1
  Top Layer w0.254: HB1.1 152.195,32.489 v1(152.607,32.902)
  Bottom Layer w0: 157.485,37.95 157.525,37.95
  Bottom Layer w0.254: v1(152.607,32.902) 154.577,32.902 158.133,36.458 158.133,46.482 155.325,49.29
RX5: "Teensy 3.5.26" GPS.3 | length 14.3
  Top Layer w0.254: GPS.3 v1(147.756,45.521) v1@147.777,45.542
  Bottom Layer w0.254: v1(147.756,45.521) 148.35,44.928 148.35,44.24 148.354,44.235 148.354,43.547 148.35,43.543 148.35,41.625 148.963,41.012 150.845,39.13 155.325,39.13
SCL0: "Teensy 3.5.9" UMB.4 | length 18.2
  Top Layer w0.254: UMB.4 176.854,62.629 v1(176.875,62.65)
  Bottom Layer w0.254: 170.565,74.69 172.572,72.683 172.617,72.658 174.325,70.975 177.706,67.594 177.706,63.556 176.875,62.725 v1(176.875,62.65)
SCL2: "Teensy 3.5.5" IMU.1 | length 14
  Top Layer w0.254: IMU.1 175.979,78.279 v1(176.35,78.65)
  Bottom Layer w0.254: 170.565,84.85 175.025,84.85 177.181,82.694 177.181,79.806 176.35,78.975 v1(176.35,78.65)
SDA0: "Teensy 3.5.10" UMB.3 | length 17.5
  Top Layer w0.254: UMB.3 176.854,63.879 v1(176.875,63.9)
  Bottom Layer w0.254: 167.565,72.15 171.9,72.15 171.9,72.075 173.65,70.325 173.65,67.125 v1(176.875,63.9)
SDA2: "Teensy 3.5.6" IMU.2 | length 11.9
  Top Layer w0.254: IMU.2 175.729,79.529 v1(176.35,80.15)
  Bottom Layer w0.254: 167.565,82.31 174.19,82.31 v1(176.35,80.15)
TX5: "Teensy 3.5.25" GPS.2 | length 11.3
  Top Layer w0.254: GPS.2 147.143,44.271 v1(147.523,43.891)
  Bottom Layer w0.254: v1(147.523,43.891) 147.523,41.392 152.325,36.59
pads on no net: "Teensy 3.5.13" "Teensy 3.5.14" "Teensy 3.5.15" "Teensy 3.5.16" "Teensy 3.5.17" "Teensy 3.5.18" "Teensy 3.5.19" "Teensy 3.5.20" "Teensy 3.5.23" "Teensy 3.5.24" "Teensy 3.5.31" "Teensy 3.5.32" "Teensy 3.5.33" "Teensy 3.5.46" A1H.5 A1H.6 A2H.7 A2H.8 DH.9 DH.10 GPS.4 GPS.6 GPS.7 IMU.5 IMU.6 IMU.7 MTR.7 MTR.8 SS1.6 SS1.7 SS2.6 SS2.7 SS3.6 SS3.7 SS4.6 SS4.7 UMB.7 UMB.8

## Polygon pours and split planes (outlines as drawn)
GND on Ground Plane (split plane): 180.795,28.73 144.147,28.73 144.147,102.741 180.795,102.741
3.3V on Power Plane (split plane): 180.795,28.73 144.147,28.73 144.147,102.741 180.795,102.741

## Other copper
Top Layer:
  text "CU-ACE /  REV1" at 175.9,96.675 h1.52 r270.77

## Silkscreen, mask and mechanical layers (free items; w line width, h text height)
Mechanical 1:
  lines w0.254: 143.764,28.194 178.816,28.194

## Text inside footprints (layer, text, board x,y; h text height)
C1: Top Overlay "+" at 160.528,28.956 h1.27 r90; Mechanical 13 "+" at 160.528,28.956 h1.27 r90
C2: Top Overlay "+" at 173.634,29.007 h1.27 r90; Mechanical 13 "+" at 173.634,29.007 h1.27 r90
C3: Top Overlay "+" at 163.728,37.617 h1.27 r90; Mechanical 13 "+" at 163.728,37.617 h1.27 r90
C4: Top Overlay "+" at 157.48,28.931 h1.27 r90; Mechanical 13 "+" at 157.48,28.931 h1.27 r90
C5: Top Overlay "+" at 170.459,28.981 h1.27 r90; Mechanical 13 "+" at 170.459,28.981 h1.27 r90
C6: Top Overlay "+" at 160.63,37.567 h1.27 r90; Mechanical 13 "+" at 160.63,37.567 h1.27 r90
C7: Top Overlay "+" at 160.426,82.398 h1.27 r90; Mechanical 13 "+" at 160.426,82.398 h1.27 r90